# Altium PCB ROGO_ALFA_PCB_V2I1.PcbDoc
Units mil, origin at the board's own origin, x right, y up, seen from the top; angles counter-clockwise.
Board outline 6000 x 4000 mil, 2 copper layers (Top Layer, Bottom Layer); 2 components, 54 nets, 7 pads, 0 vias.
Unrouted connection lines stored in the file: 1.
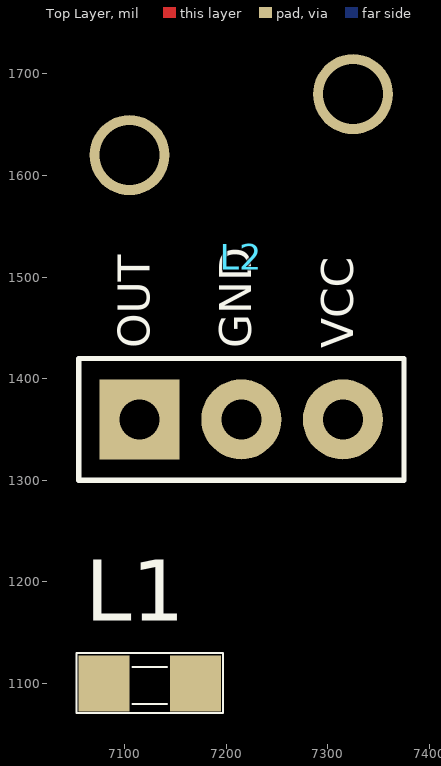
[diagram p0: Top Layer view]
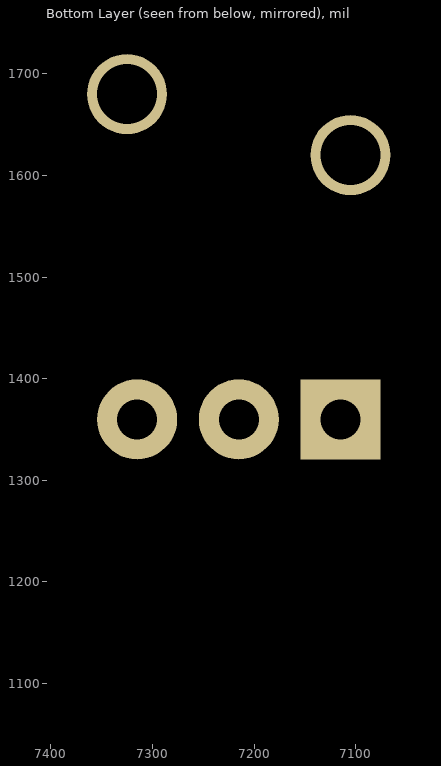
[diagram p1: Bottom Layer view, seen from below]

## Layer stack, top to bottom
Top Solder: solder mask 0.4, Solder Resist, Dk 3.5
Top Layer: signal copper 1.4
Dielectric 1: dielectric 12.6, FR-4, Dk 4.8
Bottom Layer: signal copper 1.4
Bottom Solder: solder mask 0.4, Solder Resist, Dk 3.5

## Board outline
1000,1000 7000,1000 7000,5000 1000,5000

## Design rules (kind name [scope] priority, off if disabled: settings)
Clearance [All] p1: gap=10
PolygonConnect [All] p1: connectstyle=Relief reliefconductorwidth=10 reliefentries=4 polygonreliefangle="90 Angle" airgapwidth=10
RoomDefinition "[06] - PERIPHERAL" [InComponentClass('[06] - PERIPHERAL')] p1: confinementstyle=ConfineIn formatcopy=TRUE lockcomponents=FALSE outline 7045,1290 7385,1290 7385,1840 7045,1840
RoomDefinition "[05] - POWER" [InComponentClass('[05] - POWER')] p2: confinementstyle=ConfineIn formatcopy=TRUE lockcomponents=FALSE outline 0,0 2000,0 2000,1000 0,1000
RoomDefinition "[04] - MCU STM32" [InComponentClass('[04] - MCU STM32')] p3: confinementstyle=ConfineIn formatcopy=TRUE lockcomponents=FALSE outline 7045,1060 7205,1060 7205,1240 7045,1240
RoomDefinition "[03] - MODULE BLE" [InComponentClass('[03] - MODULE BLE')] p4: confinementstyle=ConfineIn formatcopy=TRUE lockcomponents=FALSE outline 0,0 2000,0 2000,1000 0,1000
RoutingVias [All] p1: holewidth=28 width=50 viastyle="Through Hole" minholewidth=28 minwidth=50 maxholewidth=28 maxwidth=50
SolderMaskExpansion [All] p1: expansion=4
Width [All] p1: maxlimit=10 minlimit=10 preferedwidth=10
30 further rules are at their usual default settings.

## Components (designator, comment, footprint, x,y, rotation, side; value= is the part's Value field where it differs from the comment)
L1 "CHOKE_100NH_SMD0805" CHOKE_SMD0805 7125,1100 r0 top
L2 "LED3_RECEIVER_IR" LED3_IR_RECEIVER 7115,1360 r0 top

## Footprints (in the part's own frame and the unit in brackets; to place one, negate y for a bottom-side part, rotate by r counter-clockwise, add the part's x,y. Pads: shape width x height; smd on the part's side, far side on the other; paste and mask are expansions set on the pad)
CHOKE_SMD0805 [mil] "Compoment SMD 80x50mil"
  rect 50x55 smd: 1(-45,0) 2(45,0)
  silkscreen extent -72,-29 72,30, body extent -39,-25 39,25, height 22
LED3_IR_RECEIVER [mm] "HEADER, SINGLE, DISTANCE = 100mil"
  rect 2x2 hole 1: 1(0,0)
  round 2 hole 1: 2(2.54,0) 3(5.08,0)
  round 2 hole 1.5: N(-0.254,6.604) N(5.334,8.128)
  silkscreen extent -1.52,-1.52 6.6,1.52, body extent -0.7,-0.33 6.1,9.47, height 7.1

## Part data
L1: "FIXED IND 100NH 300MA 900 MOHM"
L2: library part LED3_RECEIVER_IR_HOLE_38KHz_3V, "RECEIVER IR REM CTRL 3V 38KHZ"

## Nets (pads, with @x,y where several pads share a name; then routed paths per layer and width w, separated by ;. In a path a pad name is that pad's centre, name@x,y a point inside that pad or via, vN(x,y) a via of type N, cw(c..) or ccw(c..) an arc to the next point about the centre after c; other vN are vias at no path point)
5VCC_USB: 
ADC_BAT: 
BLE_CHRG: 
BLE_LED: 
BLE_LED3W: 
BLE_RESET_ST: 
BLE_RX: 
BLE_STATUS_ST: 
BLE_STATUS_ST1: 
BLE_STATUS_ST2: 
BLE_STATUS_ST3: 
BLE_STDBY: 
BLE_TX: 
BLE_WAKEUP_ST: 
GND: L2.2
GND_PIN: 
IR_SEND1: 
IR_SEND2: 
IR_SEND3: 
IR_SEND4: 
IR_SEND5: 
IR_SEND6: 
NetC5_1: L1.1
NetC5_2: 
NetC12_1: 
NetC13_1: 
NetD1_1: 
NetD2_1: 
NetD3_1: 
NetD4_1: 
NetD5_1: 
NetD6_1: 
NetL3_1: 
NetL4_1: 
NetL5_1: 
NetL6_1: 
NetL7_1: 
NetL8_2: 
NetQ2_1: 
NetR4_2: 
NetR6_1: 
NetR8_2: 
ST_IR_OUT: 
ST_IR_RECEIVE: L2.1
ST_LED1: 
ST_LED2: 
ST_RX: 
ST_SWCLK: 
ST_SWDIO: 
ST_TX: 
SWCLK: 
SWDIO: 
VCC: L1.2 L2.3
VCC_PIN: 
pads on no net: L2.N

## Text inside footprints (layer, text, board x,y; h text height)
L2: Top Overlay "OUT" at 7125,1430 h31.5 r90; Top Overlay "GND" at 7225,1430 h31.5 r90; Top Overlay "VCC" at 7325,1430 h31.5 r90